# Altium PCB SD171-6.0PCB4.PcbDoc (part 7 of 11)
Units mil, origin at the board's own origin, x right, y up, seen from the top; angles counter-clockwise.
Board outline 5995 x 3921.26 mil, 6 copper layers (Top Layer, GND, Mid-Layer 1, Mid-Layer 2, VCC, Bottom Layer); 477 components, 539 nets, 2143 pads, 1050 vias.
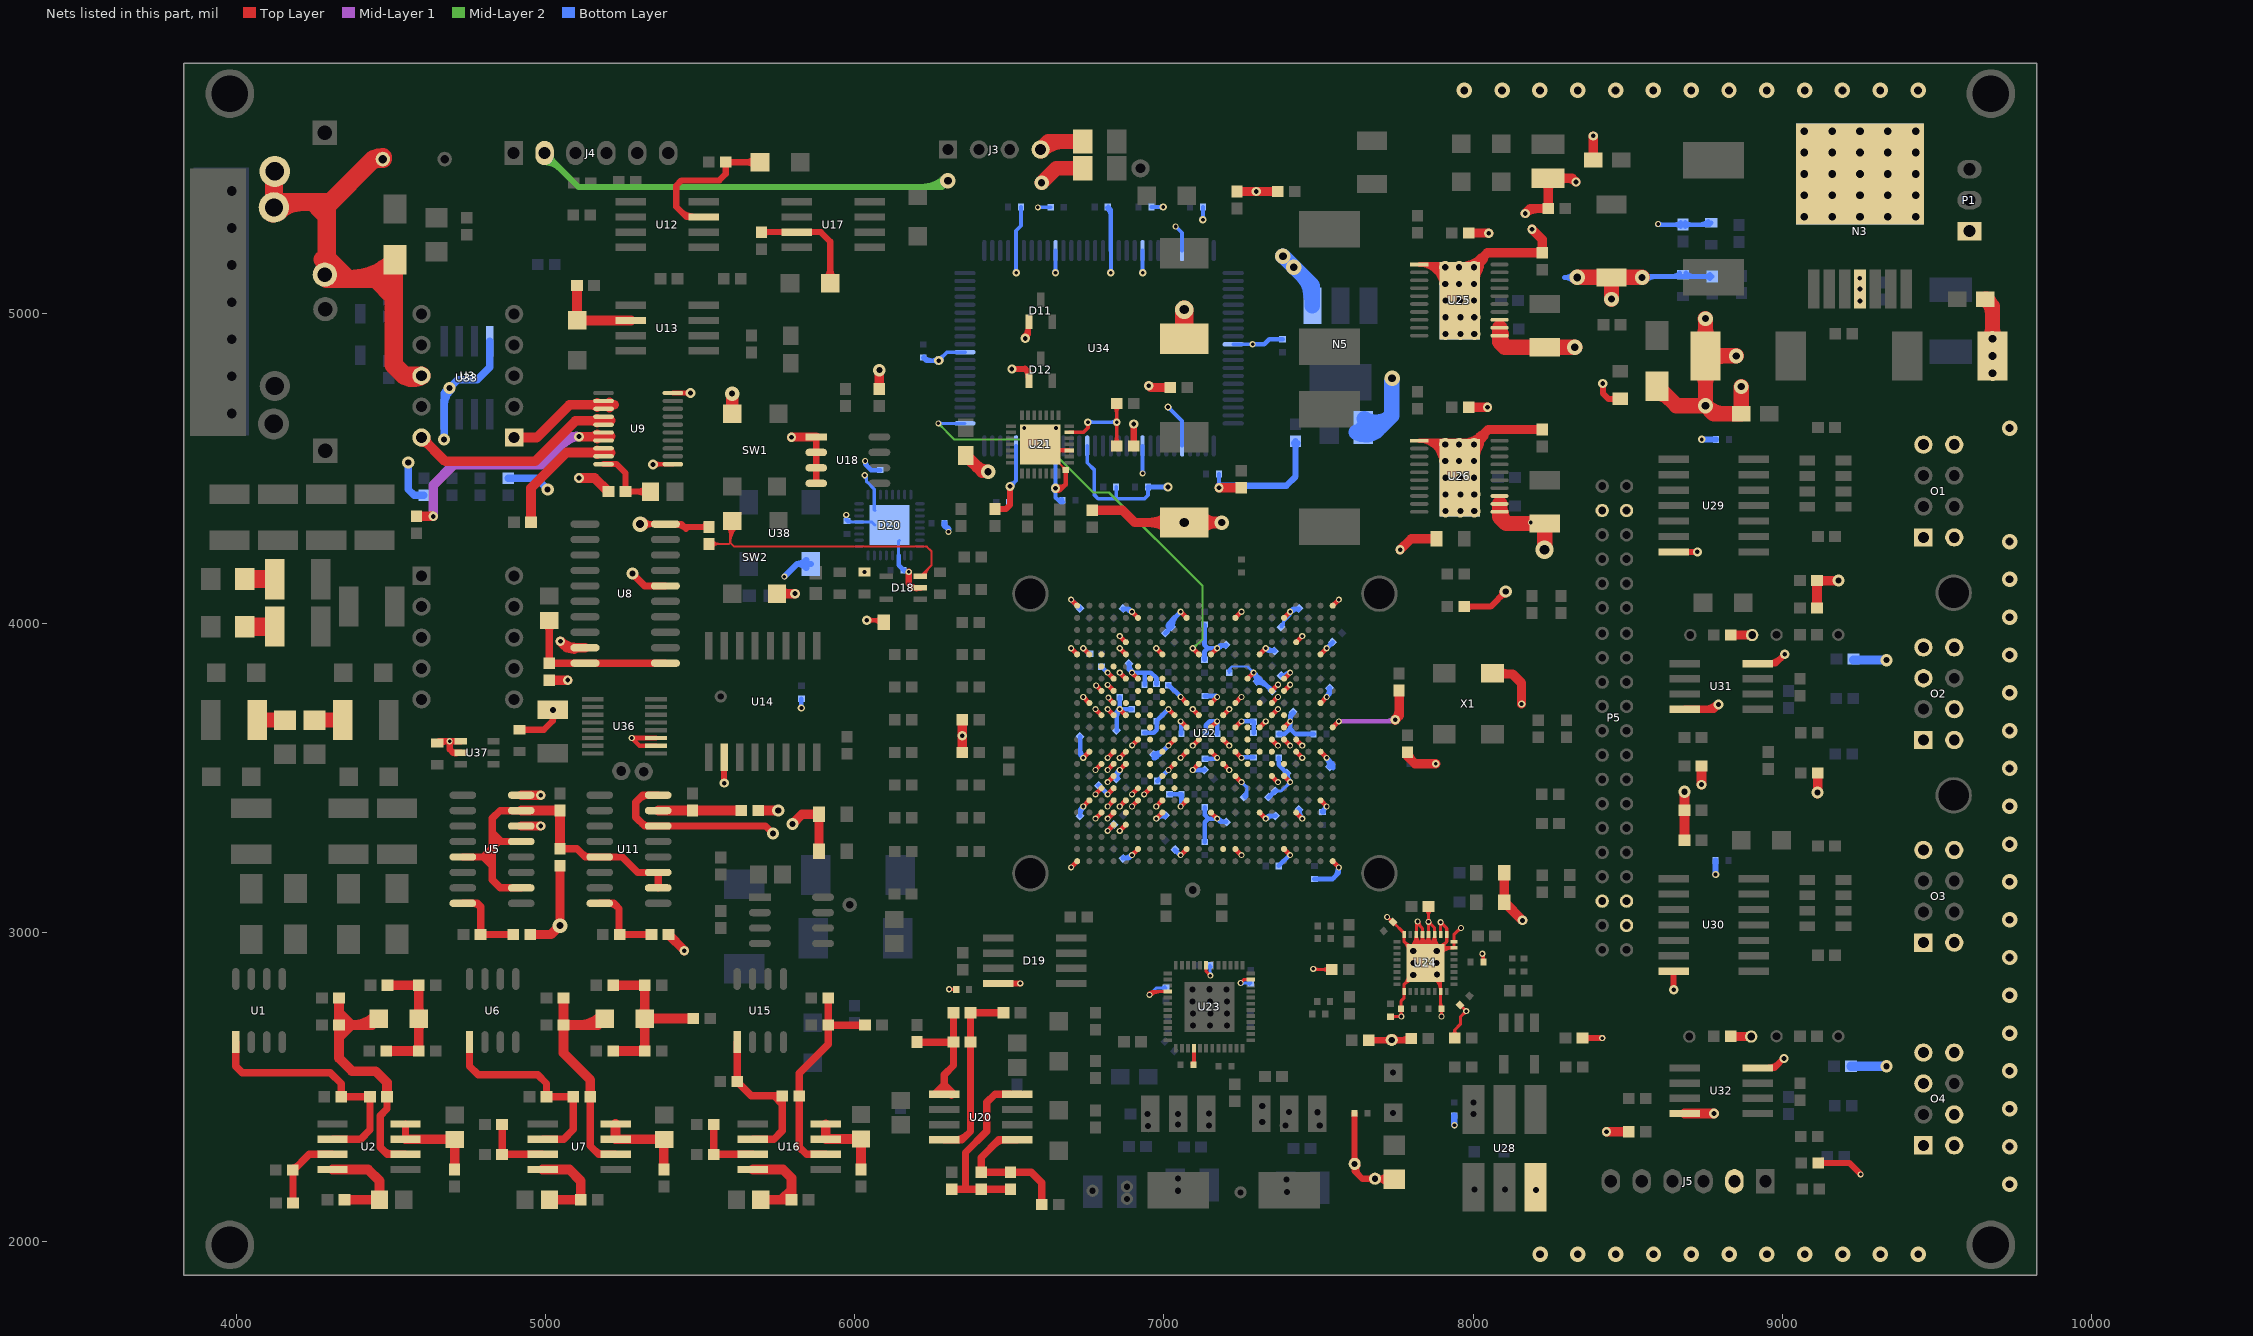
[diagram p11: the nets of this part, all layers, seen from the top]

## Via types
v1: diameter 19.68, hole 11.81, Top Layer to Bottom Layer, 521 vias
v2: diameter 50, hole 25, Top Layer to Bottom Layer, 162 vias
v3: diameter 30, hole 15, Top Layer to Bottom Layer, 100 vias
v4: diameter 39.37, hole 19.68, Top Layer to Bottom Layer, 74 vias
v5: diameter 31.5, hole 15.75, Top Layer to Bottom Layer, 44 vias
v6: diameter 40, hole 20, Top Layer to Bottom Layer, 38 vias
v7: diameter 24, hole 12, Top Layer to Bottom Layer, 33 vias
v8: diameter 47.24, hole 23.62, Top Layer to Bottom Layer, 24 vias
v9: diameter 59.06, hole 31.5, Top Layer to Bottom Layer, 10 vias
v10: diameter 60, hole 30, Top Layer to Bottom Layer, 9 vias
v11: diameter 25.98, hole 12.99, Top Layer to Bottom Layer, tented top, 9 vias
v12: diameter 23.62, hole 11.81, Top Layer to Bottom Layer, 8 vias
v13: diameter 20, hole 12, Top Layer to Bottom Layer, 6 vias
v14: diameter 50, hole 27.56, Top Layer to Bottom Layer, 4 vias
v15: diameter 51.18, hole 27.56, Top Layer to Bottom Layer, 2 vias
v16: diameter 39.37, hole 23.62, Top Layer to Bottom Layer, 2 vias
v17: diameter 80, hole 40, Top Layer to Bottom Layer, 1 vias
v18: diameter 47.24, hole 19.68, Top Layer to Bottom Layer, 1 vias
v19: diameter 47.24, hole 27.56, Top Layer to Bottom Layer, 1 vias
v20: diameter 22.05, hole 11.81, Top Layer to Bottom Layer, 1 vias

## Nets (pads, with @x,y where several pads share a name; then routed paths per layer and width w, separated by ;. In a path a pad name is that pad's centre, name@x,y a point inside that pad or via, vN(x,y) a via of type N, cw(c..) or ccw(c..) an arc to the next point about the centre after c; other vN are vias at no path point) (continued)
GND: (continued)
  Bottom Layer w7: C164.1@7207.58,3844.82 ccw(c7203.71,3851.02) 7211.02,3851.02 ; C164.1@7211.02,3839.3 7211.02,3851.02 ; C164.1@7214.46,3844.82 cw(c7218.32,3851.02) 7211.02,3851.02 ; v1(7290.1,3839.47) 7270.56,3859 7219,3859 ; 7211.02,3851.02 7219,3859 ; 7219,3859 ccw(c7228,3850) 7217.42,3842.92 cw(c7228,3850) 7219,3859 ; 7279.27,3850.29 cw(c7268.44,3839.47) v1@7283.75,3839.47 ; 7279.27,3850.29 ccw(c7290.1,3861.12) v1@7290.1,3845.81 ; 7279.27,3850.29 cw(c7268.44,3839.47) v1@7283.75,3839.47 ; 7279.27,3850.29 ccw(c7290.1,3861.12) v1@7290.1,3845.81 ; 7279.27,3850.29 ccw(c7290.1,3861.12) v1@7290.1,3845.81 ; 7279.27,3850.29 cw(c7268.44,3839.47) v1@7283.75,3839.47 ; C164.1@7211.6,3839.02 cw(c7220.78,3845.16) 7212.97,3852.97 ccw(c7220.78,3845.16) C164.1@7211.6,3839.02
  Bottom Layer w10: v1@5968.58,4346.58 cw(c5960.31,4338.31) 5972,4338.31 cw(c5983.69,4338.31) v1@5975.42,4346.58 ; v1@5972,4344.23 ccw(c5987.54,4344.23) C227.1@5976.55,4333.23 ; v1(5972,4350) 5972,4331.72 5976.87,4326.84 D20.21@6013.57,4326.84 6054.91,4326.84 D20.33@6064.76,4317 ; C227.1@5978.55,4333.23 ccw(c5993.98,4348.67) 5993.98,4326.84 ; v1@6029.21,4474.04 cw(c6017.32,4457.12) 6038,4457.12 ; v1(6032,4478) 6033,4478 6038,4473 6038,4458 6062.79,4433.21 D20.26@6062.79,4415.43 6062.79,4366.21 D20.33@6064.76,4364.24 ; D20.11@6141.53,4218.57 6141.53,4264.53 D20.33@6144,4267 ; v1(6953,2797) 6975.7,2819.7 C158.2@7006.98,2819.7 ; v1@6953,2801.84 ccw(c6953,2813.53) 6961.27,2805.27 ccw(c6969.53,2797) v1@6957.84,2797 ; C146.1@6978.3,3488.98 C146.1@6978.98,3488.98 ; C158.2@7002.45,2816.16 ccw(c6993.91,2807.63) 6993.91,2819.7 ccw(c6993.91,2831.77) C158.2@7002.45,2823.23 ; C178.1@7145.77,2888.45 cw(c7137.23,2879.91) 7149.3,2879.91 cw(c7161.37,2879.91) C178.1@7152.84,2888.45 ; v1@7146.58,2862.42 ccw(c7140,2869) 7149.3,2869 ; 7149.3,2872.38 ccw(c7163.38,2872.38) v1@7153.42,2862.42 ; C178.1@7149.3,2892.98 7149.3,2862.7 7150,2862 v1(7150,2859) ; v1@7169.01,3763.7 v1(7171.99,3760.73) ; v1@7169.56,3566.3 v1(7171.99,3563.87) ; v1(7248,2835) 7249,2835 7249.3,2834.7 C171.1@7280.98,2834.7 ; v1(7250.73,3485.13) 7269,3466.86 ; v1@7251.42,2831.58 cw(c7258.96,2824.04) 7258.96,2834.7 ; v1@7251.42,2838.42 ccw(c7260.42,2847.42) 7260.42,2834.7 ; C177.1@7259.2,3436.78 7269,3446.57 7269,3466.86 ; C171.1@7276.45,2831.16 ccw(c7267.91,2822.63) 7267.91,2834.7 ccw(c7267.91,2846.77) C171.1@7276.45,2838.23 ; C187.1@7358.8,3456.22 7379.3,3456.22 v1(7408.21,3485.13) ; C187.1@7363.04,3453.4 cw(c7369.87,3446.57) C187.1@7369.87,3456.22 ; C187.1@7363.04,3460.47 ccw(c7373.28,3470.71) 7373.28,3456.22 ; C180.1@7378.12,3992.15 ccw(c7372.99,4005.58) 7387.36,4005.58 ; C180.1@7379.2,3986.78 7387.36,3994.94 7387.36,4005.58 ; 7397.74,4015.33 cw(c7424.46,4008.17) v1@7410.63,4032.12 ; v1(7408.21,4036.32) 7408.21,4026.42 ; 7258.99,3476.87 cw(c7267.26,3485.13) 7255.57,3485.13 ccw(c7267.26,3485.13) 7258.99,3476.87 ; 7258.99,3476.87 ccw(c7250.73,3468.6) 7250.73,3480.29 cw(c7250.73,3468.6) 7258.99,3476.87 ; 7269,3466.86 cw(c7236.34,3466.86) 7256.78,3441.38 ccw(c7236.34,3466.86) 7269,3466.86 ; 7387.36,4005.58 7408.21,4026.42 ; 7392.94,4011.16 ccw(c7367.79,4036.32) v1@7403.36,4036.32 ; 7392.94,4011.16 ccw(c7367.79,4036.32) v1@7403.36,4036.32 ; 7392.94,4011.16 ccw(c7367.79,4036.32) v1@7403.36,4036.32 ; 7399.94,3476.87 cw(c7408.21,3468.6) 7408.21,3480.29 ccw(c7408.21,3468.6) 7399.94,3476.87 ; 7399.94,3476.87 ccw(c7391.67,3485.13) 7403.36,3485.13 cw(c7391.67,3485.13) 7399.94,3476.87 ; 7408.21,4026.42 cw(c7415.89,4026.42) 7411.18,4032.49 ccw(c7415.89,4026.42) 7408.21,4026.42 ; 7408.21,4026.42 ccw(c7400.52,4026.42) 7405.24,4032.49 cw(c7400.52,4026.42) 7408.21,4026.42 ; C177.1@7263.04,3433.58 ccw(c7253.06,3446.01) 7269,3446.01 cw(c7253.06,3446.01) C177.1@7263.04,3433.58
  Bottom Layer w12: v3(6271,4849) 6298.2,4876.2 U34.40@6355.94,4876.2 ; v3@6271.07,4858 ccw(c6271.24,4879.15) 6286.37,4864.37 ; v3@6271.1,4858 ccw(c6271.35,4878.86) 6285.93,4863.94 ccw(c6300.86,4849.35) v3@6280,4849.1 ; v3@6280,4849.07 cw(c6301.15,4849.24) 6286.37,4864.37 ; C115.1@6499.3,4390.98 6499.3,4439.3 v3(6502,4442) 6503,4442 6521.3,4460.3 U34.26@6521.3,4573.06 ; v7(6522,5133) 6521.3,5133.7 U34.55@6521.3,5204.94 6521.3,5269.3 6537.3,5285.3 C114.1@6537.3,5345.98 ; v1(6592,5345) C117.1@6633.7,5345.02 ; v7(6649,5133) 6649.25,5133.25 U34.60@6649.25,5204.94 ; U34.21@6649.25,4573.06 6649.25,4436.25 v3(6649,4436) 6649,4405 ; 6660.78,4393.22 ccw(c6669.66,4402.1) C118.1@6675.27,4390.86 ; C118.1@6669.91,4401.6 cw(c6661.82,4417.82) 6649,4405 ; C118.1@6671.7,4397.02 6656.98,4397.02 6649,4405 ; U34.17@6751.61,4573.06 6751.61,4518.28 6774.84,4495.05 6774.84,4414.16 6787,4402 6846,4402 ; v7(6828,5133) 6828.39,5133.39 U34.67@6828.39,5204.94 ; C120.1@6845.3,4439.98 6845.3,4402.7 6846,4402 ; U34.10@6930.75,4573.06 6930.75,4484.25 v1(6931,4484) ; U34.71@6930.75,5204.94 6930.75,5133.25 v7(6931,5133) ; C127.1@6948.3,4439.98 6948.3,4413.3 6937,4402 6846,4402 ; C138.1@6959.3,5345.98 v7(6998,5346) ; v7(7013,4699) 7058.7,4653.3 U34.5@7058.7,4573.06 ; v1(7038,5283) 7058.7,5262.3 U34.76@7058.7,5204.94 ; v7(7126,5305) 7126.3,5305.3 C152.1@7126.3,5345.98 ; v3(7178,4438) 7178,4444 7178.3,4444.3 C159.1@7178.3,4481.98 ; U34.90@7224.06,4901.8 7286.8,4901.8 v1(7287,4902) ; v3@6271,4858 ccw(c6271,4879.73) 6286.36,4864.36 ; v3@6271,4858 ccw(c6271,4879.73) 6286.36,4864.36 ; v3@6271,4858 ccw(c6271,4879.73) 6286.36,4864.36 ; v3@6280,4849 cw(c6301.73,4849) 6286.36,4864.36 ; v3@6280,4849 cw(c6301.73,4849) 6286.36,4864.36 ; v3@6280,4849 cw(c6301.73,4849) 6286.36,4864.36 ; v3@6495.64,4435.64 cw(c6486.79,4426.79) 6499.3,4426.79 ; v3@6495.64,4435.64 cw(c6486.79,4426.79) 6499.3,4426.79 ; v3@6495.64,4435.64 cw(c6486.79,4426.79) 6499.3,4426.79 ; 6499.3,4413.76 cw(c6530.24,4413.76) v3@6508.36,4435.64 ; 6499.3,4413.76 cw(c6530.24,4413.76) v3@6508.36,4435.64 ; 6499.3,4413.76 cw(c6530.24,4413.76) v3@6508.36,4435.64 ; v3@6502,4451 ccw(c6502,4475.14) 6519.07,4458.07 ; v3@6502,4451 ccw(c6502,4475.14) 6519.07,4458.07 ; v3@6502,4451 ccw(c6502,4475.14) 6519.07,4458.07 ; v3@6511,4442 cw(c6530.31,4442) 6516.66,4455.66 ; v3@6511,4442 cw(c6530.31,4442) 6516.66,4455.66 ; v3@6511,4442 cw(c6530.31,4442) 6516.66,4455.66 ; v3@6642.64,4429.64 cw(c6627.27,4414.27) 6649,4414.27 ; v3@6642.64,4429.64 cw(c6627.27,4414.27) 6649,4414.27 ; v3@6642.64,4429.64 cw(c6627.27,4414.27) 6649,4414.27 ; v3@6642.64,4442.36 ccw(c6626.66,4458.34) 6649.25,4458.34 ; v3@6642.64,4442.36 ccw(c6626.66,4458.34) 6649.25,4458.34 ; v3@6642.64,4442.36 ccw(c6626.66,4458.34) 6649.25,4458.34 ; 6649,4414.27 cw(c6670.73,4414.27) v3@6655.36,4429.64 ; 6649,4414.27 cw(c6670.73,4414.27) v3@6655.36,4429.64 ; 6649,4414.27 cw(c6670.73,4414.27) v3@6655.36,4429.64 ; 6649.25,4457.12 ccw(c6670.12,4457.12) v3@6655.36,4442.36 ; 6649.25,4457.12 ccw(c6670.12,4457.12) v3@6655.36,4442.36 ; 6649.25,4457.12 ccw(c6670.12,4457.12) v3@6655.36,4442.36 ; 6930.75,4493.89 ccw(c6940.89,4493.89) v1@6933.72,4486.72 ; 6930.75,4493.89 ccw(c6940.89,4493.89) v1@6933.72,4486.72 ; 6930.75,4493.89 ccw(c6940.89,4493.89) v1@6933.72,4486.72 ; v7@7013,4693 cw(c7013,4678.51) 7023.24,4688.76 ; v7@7013,4693 cw(c7013,4678.51) 7023.24,4688.76 ; v7@7013,4693 cw(c7013,4678.51) 7023.24,4688.76 ; v7@7019,4699 ccw(c7033.49,4699) 7023.24,4688.76 ; v7@7019,4699 ccw(c7033.49,4699) 7023.24,4688.76 ; v7@7019,4699 ccw(c7033.49,4699) 7023.24,4688.76 ; v3@7171.64,4444.36 ccw(c7155.55,4460.45) 7178.3,4460.45 ; v3@7171.64,4444.36 ccw(c7155.55,4460.45) 7178.3,4460.45 ; v3@7171.64,4444.36 ccw(c7155.55,4460.45) 7178.3,4460.45 ; 7178.3,4459 ccw(c7199,4459) v3@7184.36,4444.36 ; 7178.3,4459 ccw(c7199,4459) v3@7184.36,4444.36 ; 7178.3,4459 ccw(c7199,4459) v3@7184.36,4444.36 ; v7@6517.76,5137.24 ccw(c6509.21,5145.79) 6521.3,5145.79 cw(c6509.21,5145.79) v7@6517.76,5137.24 ; 6521.3,5149.18 ccw(c6538.18,5149.18) 6526.24,5137.24 cw(c6538.18,5149.18) 6521.3,5149.18 ; v7@6644.76,5137.24 ccw(c6633.91,5148.09) 6649.25,5148.09 cw(c6633.91,5148.09) v7@6644.76,5137.24 ; 6649.25,5146.88 ccw(c6662.88,5146.88) 6653.24,5137.24 cw(c6662.88,5146.88) 6649.25,5146.88 ; v7@6823.76,5137.24 ccw(c6812.58,5148.42) 6828.39,5148.42 cw(c6812.58,5148.42) v7@6823.76,5137.24 ; 6828.39,5146.55 ccw(c6841.55,5146.55) 6832.24,5137.24 cw(c6841.55,5146.55) 6828.39,5146.55 ; v7@6926.76,5137.24 ccw(c6917.12,5146.88) 6930.75,5146.88 cw(c6917.12,5146.88) v7@6926.76,5137.24 ; 6930.75,5148.09 ccw(c6946.09,5148.09) 6935.24,5137.24 cw(c6946.09,5148.09) 6930.75,5148.09 ; 6983.47,5345.98 ccw(c6983.47,5360.53) 6993.76,5350.24 cw(c6983.47,5360.53) 6983.47,5345.98 ; 6983.56,5345.98 cw(c6983.56,5331.56) 6993.76,5341.76 ccw(c6983.56,5331.56) 6983.56,5345.98 ; v7@7121.76,5309.24 ccw(c7110.79,5320.21) 7126.3,5320.21 cw(c7110.79,5320.21) v7@7121.76,5309.24 ; 7126.3,5318.76 ccw(c7139.76,5318.76) 7130.24,5309.24 cw(c7139.76,5318.76) 7126.3,5318.76
  Bottom Layer w15: v7(5827,3725) C110.1@5826.98,3754.7 ; v1(6033,4524) 6033,4514 6052.3,4494.7 C224.1@6082.02,4494.7 ; v1@6035.34,4524 ccw(c6065.14,4524) 6044.07,4502.93 ; D20.11@6141.53,4218.57 6141.53,4187.15 C226.1@6157.7,4170.98 6160.68,4168 6176,4168 6176,4167.26 v1(6174.4,4165.66) ; C226.1@6159.47,4171.75 ccw(c6168.52,4180.81) v1@6168.52,4168 ; C113.1@6220.98,4858.7 6230.68,4849 v3(6271,4849) ; v1(6699.54,4075.69) 6728.8,4046.43 C121.1@6728.8,4046.22 ; C126.1@6728.8,3376.22 6728.8,3396.28 v1(6738.91,3406.39) ; 6728.8,3392.09 cw(c6740.89,3392.09) v1@6739.23,3404.07 ; C124.1@6728.78,3632.8 6728.78,3574.01 v1(6738.91,3563.87) ; v1(6738.91,3918.21) 6756.82,3900.3 C123.1@6761.02,3900.3 ; C125.1@6788.2,3474.78 6788.64,3474.78 v1(6817.65,3445.76) ; C122.1@6797.98,3858.7 6817.22,3839.47 v1(6817.65,3839.47) ; v1(6817.65,3327.65) C135.1@6837.78,3347.8 ; C119.1@6818.23,5342.48 cw(c6817.96,5332.06) 6828.39,5332.06 ; C119.1@6819.3,5345.98 6828.39,5336.9 U34.67@6828.39,5204.94 ; C134.1@6846.8,3495.22 6846.8,3514.28 v1(6857.02,3524.5) ; 6846.8,3510.05 cw(c6859.06,3510.05) v1@6857.35,3522.18 ; C133.1@6846.8,3652.22 6846.8,3711.13 v1(6857.02,3721.36) ; 6846.8,3706.9 cw(c6859.06,3706.9) v1@6857.35,3719.04 ; C130.1@6856.7,3760.02 6856.7,3721.68 v1(6857.02,3721.36) ; C128.1@6867.22,4046.2 6886.51,4046.2 v1(6896.39,4036.32) ccw(c6876.94,4016.86) C128.1@6868.68,4043.11 ; 6885.66,4040.01 ccw(c6892.45,4051.54) v1@6895.81,4038.58 ; C129.1@6886.78,3868.8 6886.78,3849.08 v1(6896.39,3839.47) 6936,3839.47 ; 6892.79,3850.23 cw(c6881.2,3843.54) v1@6894.13,3840.07 ; C132.1@6895.36,3721.36 v1(6857.02,3721.36) ; C144.1@6936.02,3645.3 6966.3,3645.3 6976.3,3655.3 C143.1@6976.3,3681.98 6976.3,3683.15 v1(7014.5,3721.36) ; C131.1@6937.3,3799.98 6937.3,3838.17 6936,3839.47 ; C127.1@6948.3,4439.98 v3(7013,4440) ; C145.1@6965.8,3574.22 6985.48,3574.22 v1(7014.5,3603.24) ; C145.1@6966.51,3562.43 ccw(c6966.51,3579.78) 6978.77,3567.51 ; C142.1@6976.02,3802.3 6976.02,3820.98 6957.53,3839.47 6936,3839.47 ; C146.1@6978.98,3488.98 v1(7014.5,3524.5) ; C147.1@7003.37,3374.12 ccw(c6995.19,3346.97) v1(6975.13,3367.02) 6985.33,3377.22 C147.1@7004.8,3377.22 ; C139.1@7004.8,3967.22 7024.2,3986.63 C140.1@7024.2,3986.78 7024.2,4006.64 v1(7053.87,4036.32) ; C140.1@7012.41,3987.48 cw(c7030.19,3987.48) 7017.62,4000.06 ; C141.1@7013.98,3798.7 7015.9,3798.7 v1(7053.87,3760.73) ; C156.1@7017.98,3445.7 7056.38,3445.7 C155.1@7056.7,3446.02 7056.7,3409.22 v1(7053.87,3406.39) ; C148.1@7035.2,3266.78 7053.06,3248.91 v1(7053.87,3248.91) ; v1(7053.87,3681.99) 7056.3,3679.56 C154.1@7056.3,3641.98 ; v1(7093.24,3524.5) 7131.52,3524.5 C167.1@7131.8,3524.22 ; C162.1@7131.02,3881.3 7131.02,3907.02 7142.21,3918.21 ; C160.1@7131.02,3994.7 7131.02,3929.39 7142.21,3918.21 ; C170.1@7132.02,3291.3 7132.02,3355.06 7143.98,3367.02 ; C169.1@7131.98,3403.7 7131.98,3379.02 7143.98,3367.02 ; C166.1@7132.98,3560.7 7168.81,3560.7 v1(7171.99,3563.87) ; C163.2@7133.02,3763.7 v1@7169.01,3763.7 ; C153.1@7135.3,3641.98 7135.3,3669.3 7147.99,3681.99 v1(7171.99,3681.99) 7172.7,3681.27 C165.1@7172.7,3641.98 ; v1@7172.54,3920.48 ccw(c7175.67,3933.49) 7182.65,3922.08 ; C161.1@7199.38,3925.12 ccw(c7191.48,3898.72) v1(7171.99,3918.21) ; C168.1@7201.78,3356.8 7182.21,3356.8 v1(7171.99,3367.02) 7143.98,3367.02 ; v1(7250.73,3563.87) 7252.15,3565.3 C174.1@7289.98,3565.3 ; v1(7250.73,3681.99) 7288.7,3681.99 C173.1@7289.98,3680.7 C175.1@7289.98,3644.3 ; v1(7287,4902) 7325,4902 7341.3,4918.3 C179.1@7384.02,4918.3 ; v1@7292.36,3838.86 ccw(c7305.28,3835.4) 7293.7,3828.71 ; C172.1@7297.12,3811.63 ccw(c7270.29,3819.66) v1(7290.1,3839.47) 7300.22,3829.34 C172.1@7300.22,3810.2 7320.22,3810.2 C183.1@7350.22,3780.2 ; 7307.33,3822.24 cw(c7296,3810.91) C172.1@7312.02,3810.91 ; v1(7329.47,3367.02) 7338.67,3376.22 C189.1@7360.8,3376.22 ; v1@7330.07,3915.94 cw(c7333.54,3903.02) 7340.23,3914.61 ; C176.1@7338.2,3436.78 7339.35,3436.78 C187.1@7358.8,3456.22 ; C182.1@7356.12,3912.82 cw(c7346.85,3935.59) v1(7329.47,3918.21) 7337.87,3909.8 C182.1@7357.78,3909.8 ; C190.1@7371.3,3214.02 7406.2,3248.91 v1(7408.21,3248.91) ; C186.1@7371.3,3563.98 7371.3,3541.27 C188.1@7397.78,3514.8 ; C185.1@7371.3,3640.98 7390.98,3640.98 7408.21,3658.21 ; C181.1@7379.2,3830.78 7399.52,3830.78 v1(7408.21,3839.47) ; 7397.45,3835.87 cw(c7404.14,3824.28) v1@7407.6,3837.2 ; C188.1@7400.89,3513.4 ccw(c7428.56,3505.49) v1(7408.21,3485.13) 7397.78,3495.56 C188.1@7397.78,3514.8 ; v1@7408.76,4038.59 ccw(c7411.91,4051.6) 7418.88,4040.18 ; C184.1@7418.2,3711.78 7408.21,3701.78 v1(7408.21,3681.99) 7408.21,3658.21 ; C191.1@7435.37,4043.13 ccw(c7427.47,4017.05) v1(7408.21,4036.32) 7418.11,4046.22 C191.1@7436.8,4046.22 ; C195.1@7439.9,3395.45 ccw(c7468.47,3387.91) v1(7447.58,3367.02) 7436.78,3377.82 C195.1@7436.78,3396.8 ; C193.1@7483.7,3640.98 7425.43,3640.98 7408.21,3658.21 ; C197.1@7486.98,3171.7 7545.7,3171.7 7566,3192 v1(7566,3209) ; C196.1@7513.02,3388.3 7513.02,3393.09 v1(7526.32,3406.39) ; v1@7526,3561.55 cw(c7524.43,3549.86) 7536.22,3549.86 ; v1(7526.32,3918.21) 7545.78,3937.67 C204.1@7545.78,3937.8 ; C192.1@7533.11,3788.32 cw(c7506.91,3780.14) v1(7526.32,3760.73) 7536.2,3770.61 C192.1@7536.2,3789.78 ; C194.1@7533.14,3535.67 ccw(c7506.63,3544.19) v1(7526.32,3563.87) 7536.22,3553.97 C194.1@7536.22,3534.2 ; 7542.88,3547.31 cw(c7530.48,3534.91) C194.1@7548.02,3534.91 ; 7543.69,3546.5 cw(c7532.93,3535.74) C194.1@7547.42,3531.09 ; 7549.98,3175.98 ccw(c7516.96,3209) v1@7563.66,3209 ; 7554.2,3180.2 ccw(c7530.49,3203.91) v1@7563.68,3208.67 ; C207.1@7837.3,3544.98 v7(7879,3545) ; v1@8186,4325 8185,4324 8186,4324 v1(8187,4325) ; v2@8324.57,5105.68 ccw(c8295,5076.36) 8295,5118 ; v2@8324.57,5130.32 cw(c8295,5159.64) 8295,5118 ; v2(8337,5118) 8295,5118 ; v8(8547,5118) 8550,5121 R141.1@8774,5121 ; v8@8558.4,5106.6 cw(c8593.16,5071.84) 8593.16,5121 ; v8@8558.4,5129.4 ccw(c8578.68,5149.68) 8578.68,5121 ; v1(8599,5291) 8598,5291 8596,5289 R142.1@8679,5289 8765,5289 C219.1@8771,5295 ; v1@8600.66,5292.66 ccw(c8609.48,5301.48) 8609.48,5289 ; 8641.72,5121 ccw(c8641.72,5159.59) C218.1@8669.01,5132.3 ; R142.1@8671.58,5281.58 ccw(c8653.65,5263.65) 8653.65,5289 ccw(c8653.65,5314.35) R142.1@8671.58,5296.42 ; R142.1@8686.42,5281.58 cw(c8704.35,5263.65) 8704.35,5289 cw(c8704.35,5314.35) R142.1@8686.42,5296.42 ; C218.1@8688.99,5132.3 ccw(c8716.28,5159.59) 8716.28,5121 ; 8733.72,5289 ccw(c8733.72,5327.59) C219.1@8761.01,5300.3 ; R141.1@8766.58,5113.58 ccw(c8748.65,5095.65) 8748.65,5121 ccw(c8748.65,5146.35) R141.1@8766.58,5128.42 ; 6252.89,4849 cw(c6252.89,4830.89) v3@6265.7,4843.7 ; 6252.89,4849 ccw(c6252.89,4867.11) v3@6265.7,4854.3 ; 6252.89,4849 cw(c6252.89,4830.89) v3@6265.7,4843.7 ; 6252.89,4849 ccw(c6252.89,4867.11) v3@6265.7,4854.3 ; 6252.89,4849 ccw(c6252.89,4867.11) v3@6265.7,4854.3 ; 6252.89,4849 cw(c6252.89,4830.89) v3@6265.7,4843.7 ; v1(6857.02,3524.5) ccw(c6876.95,3504.57) 6849.91,3496.64 cw(c6876.95,3504.57) v1(6857.02,3524.5) ; C136.1@6867.2,3238.78 ccw(c6867.2,3276.81) 6894.7,3250.53 cw(c6867.2,3276.81) C136.1@6867.2,3238.78 ; C136.1@6867.2,3238.78 6886.26,3238.78 v1(6896.39,3248.91) ; C128.1@6867.22,4046.2 cw(c6867.23,4007.65) v1@6894.72,4034.67 ; C128.1@6867.22,4046.2 cw(c6867.23,4007.65) v1@6894.72,4034.67 ; C128.1@6867.22,4046.2 cw(c6867.23,4007.65) v1@6894.72,4034.67 ; C129.1@6886.78,3868.34 ccw(c6925.26,3868.34) v1@6898.05,3841.12 ; C129.1@6886.78,3868.34 ccw(c6925.26,3868.34) v1@6898.05,3841.12 ; C129.1@6886.78,3868.34 ccw(c6925.26,3868.34) v1@6898.05,3841.12 ; v1(6896.39,3248.91) cw(c6876.6,3268.7) 6868.62,3241.88 ccw(c6876.6,3268.7) v1(6896.39,3248.91) ; 6994.85,4439.98 ccw(c6994.85,4458.15) v3@7007.7,4445.3 ; 6994.85,4439.98 ccw(c6994.85,4458.15) v3@7007.7,4445.3 ; 6994.85,4439.98 ccw(c6994.85,4458.15) v3@7007.7,4445.3 ; 6994.93,4439.98 cw(c6994.93,4421.93) v3@7007.7,4434.7 ; 6994.93,4439.98 cw(c6994.93,4421.93) v3@7007.7,4434.7 ; 6994.93,4439.98 cw(c6994.93,4421.93) v3@7007.7,4434.7 ; C147.1@7004.8,3377.22 ccw(c7004.8,3338.22) 6976.81,3365.39 cw(c7004.8,3338.22) C147.1@7004.8,3377.22 ; 7142.21,3918.21 v1(7171.99,3918.21) ; v1(7171.99,3918.21) 7182,3928.22 C161.1@7200.8,3928.22 ; v1@7173.68,3916.59 cw(c7200.8,3890.81) C161.1@7200.8,3928.22 ; v1@7173.68,3916.59 cw(c7200.8,3890.81) C161.1@7200.8,3928.22 ; v1@7173.68,3916.59 cw(c7200.8,3890.81) C161.1@7200.8,3928.22 ; v1@7288.44,3837.81 cw(c7259.99,3809.36) C172.1@7300.22,3809.36 ; v1@7288.44,3837.81 cw(c7259.99,3809.36) C172.1@7300.22,3809.36 ; v1@7288.44,3837.81 cw(c7259.99,3809.36) C172.1@7300.22,3809.36 ; v1@7331.12,3919.86 ccw(c7355.42,3944.16) C182.1@7355.42,3909.8 ; v1@7331.12,3919.86 ccw(c7355.42,3944.16) C182.1@7355.42,3909.8 ; v1@7331.12,3919.86 ccw(c7355.42,3944.16) C182.1@7355.42,3909.8 ; C181.1@7381.57,3830.78 ccw(c7381.57,3866.1) v1@7406.55,3841.12 ; C181.1@7381.57,3830.78 ccw(c7381.57,3866.1) v1@7406.55,3841.12 ; C181.1@7381.57,3830.78 ccw(c7381.57,3866.1) v1@7406.55,3841.12 ; C188.1@7397.78,3514.8 ccw(c7436.27,3514.8) 7409.82,3486.83 cw(c7436.27,3514.8) C188.1@7397.78,3514.8 ; v1@7409.9,4034.7 cw(c7436.8,4009.08) C191.1@7436.8,4046.22 ; v1@7409.9,4034.7 cw(c7436.8,4009.08) C191.1@7436.8,4046.22 ; v1@7409.9,4034.7 cw(c7436.8,4009.08) C191.1@7436.8,4046.22 ; C195.1@7436.78,3396.8 ccw(c7474.73,3396.8) 7449.15,3368.75 cw(c7474.73,3396.8) C195.1@7436.78,3396.8 ; C113.1@6223.75,4860.47 ccw(c6251.43,4888.15) 6251.43,4849 cw(c6251.43,4888.15) C113.1@6223.75,4860.47 ; C126.1@6728.8,3376.32 cw(c6768.98,3376.32) 6740.57,3404.74 ccw(c6768.98,3376.32) C126.1@6728.8,3376.32 ; 6728.78,3594 ccw(c6769.04,3594) 6740.57,3565.53 cw(c6769.04,3594) 6728.78,3594 ; C123.1@6750.29,3906.83 ccw(c6760.02,3916.56) 6760.02,3902.8 cw(c6760.02,3916.56) C123.1@6750.29,3906.83 ; C119.1@6816.53,5343.22 cw(c6787.92,5314.6) 6828.39,5314.6 ccw(c6787.92,5314.6) C119.1@6816.53,5343.22 ; C134.1@6846.8,3494.17 cw(c6887.36,3494.17) 6858.68,3522.85 ccw(c6887.36,3494.17) C134.1@6846.8,3494.17 ; 6846.8,3691.02 cw(c6887.36,3691.02) 6858.68,3719.7 ccw(c6887.36,3691.02) 6846.8,3691.02 ; C145.1@6966.51,3577.43 ccw(c6966.51,3630.99) 7004.38,3593.12 cw(c6966.51,3630.99) C145.1@6966.51,3577.43 ; C140.1@7027.41,3987.48 cw(c7081.41,3987.48) 7043.22,4025.67 ccw(c7081.41,3987.48) C140.1@7027.41,3987.48 ; v1@7052.22,3408.05 ccw(c7041.4,3418.87) 7056.7,3418.87 cw(c7041.4,3418.87) v1@7052.22,3408.05 ; v1@7052.22,3680.33 cw(c7042.36,3670.47) 7056.3,3670.47 ccw(c7042.36,3670.47) v1@7052.22,3680.33 ; 7158.67,3560.7 ccw(c7158.67,3577.19) 7170.33,3565.53 cw(c7158.67,3577.19) 7158.67,3560.7 ; 7159.15,3763.7 cw(c7159.15,3747.89) 7170.33,3759.07 ccw(c7159.15,3747.89) 7159.15,3763.7 ; v1@7173.66,3368.66 ccw(c7201.77,3396.05) C168.1@7201.78,3356.8 cw(c7201.77,3396.05) v1@7173.66,3368.66 ; v1@7289.77,3837.15 cw(c7288.11,3825.14) 7300.22,3825.14 ccw(c7288.11,3825.14) v1@7289.77,3837.15 ; C172.1@7300.93,3806.99 cw(c7300.93,3752.67) 7339.34,3791.08 ccw(c7300.93,3752.67) C172.1@7300.93,3806.99 ; C172.1@7300.93,3821.99 cw(c7300.93,3803.89) 7313.74,3816.69 ccw(c7300.93,3803.89) C172.1@7300.93,3821.99 ; v1@7331.12,3365.37 cw(c7357.34,3339.15) 7357.34,3376.22 ccw(c7357.34,3339.15) v1@7331.12,3365.37 ; v1@7408.21,3682.61 cw(c7445.95,3682.61) 7419.26,3709.3 ccw(c7445.95,3682.61) v1@7408.21,3682.61 ; C196.1@7516.52,3388.3 cw(c7536.54,3388.3) 7522.38,3402.46 ccw(c7536.54,3388.3) C196.1@7516.52,3388.3 ; v1@7524.66,3562.22 cw(c7496.74,3534.3) 7536.22,3534.3 ccw(c7496.74,3534.3) v1@7524.66,3562.22 ; v1@7524.68,3762.4 ccw(c7497.93,3789.77) C192.1@7536.2,3789.78 cw(c7497.93,3789.77) v1@7524.68,3762.4
  Bottom Layer w19.68: C225.1@6289.7,4322.98 6289.7,4316.62 v1@6303,4303.32
  Bottom Layer w20: v1(5772,4150) 5813,4191 ; U38.2@5842.52,4177.9 ccw(c5813,4151.2) 5813,4191 ; U38.2@5842.52,4204.1 cw(c5813,4230.8) 5813,4191 ; U38.2@5857,4191 5813,4191 ; v3@7178,4444 7396,4444 7426,4474 C228.2@7426,4588 ; v3@7181.54,4434.46 cw(c7204.56,4411.44) 7204.56,4444 ; C228.2@7420.34,4581.34 cw(c7406.69,4567.69) 7426,4567.69 cw(c7445.31,4567.69) C228.2@7431.66,4581.34 ; C209.1@7938.98,2406.7 7938.98,2376.02 v1(7940,2375) ; v7(8740,4594) C210.1@8785.7,4594.02 ; v7(8784.7,3186.3) C211.1@8784.7,3232.02
  Bottom Layer w23.62: v4(4555,4519) 4555,4432 4574,4413 C106.2@4606,4413 ; v4(4671,4594) U33.8@4671,4676 4671,4743 4715,4787 4778,4787 4818.64,4827.64 U33.4@4818.64,4912.22 ; v4@4681.95,4741.92 ccw(c4662.47,4753.16) v4@4684.2,4758.98 ; R119.2@4878.32,4468 4970,4468 v4(5006,4432) ; U33.8@4671,4699.95 cw(c4748.05,4699.95) 4693.57,4754.43 ccw(c4748.05,4699.95) U33.8@4671,4699.95 ; U33.8@4671,4709.45 cw(c4738.55,4709.45) 4690.78,4757.22 ccw(c4738.55,4709.45) U33.8@4671,4709.45 ; 4671,4735.96 cw(c4691.33,4735.96) 4688.54,4756.1 ccw(c4691.33,4735.96) 4671,4735.96 ; 4677.2,4733.68 ccw(c4649.49,4749.68) 4680.39,4757.96 cw(c4649.49,4749.68) 4677.2,4733.68
  Bottom Layer w30: R129.2@9223,2566 v6(9338,2566) ; R126.2@9231,3880 v6(9338,3880)
  Bottom Layer w50: v2(7385,5187) 7480.45,5091.55 N5.1@7480.45,5026.29 ; 7447.45,5124.55 cw(c7378.73,5055.82) N5.1@7475.92,5055.82 ; C229.2@7622.64,4617.41 ccw(c7651.85,4665.82) 7691.84,4625.84 ; C229.2@7645.12,4633 7699,4633 7737,4671 ; C229.2@7648.47,4660.22 ccw(c7685.85,4722.15) 7737,4671 ; v2@7737,4780 7737,4671
  other v1: 6031,4165 6303,4295
  other v2: 8216.89,1957.6 8339.24,1957.6 8461.58,1957.6 8583.93,1957.6 8706.27,1957.6 8828.62,1957.6 8950.97,1957.6 9073.31,1957.6 9195.66,1957.6 9318.01,1957.6 9440.35,1957.6 9736,2183.69 9736,2306.04 9736,2428.39 9736,2550.73 9736,2673.08 9736,2795.43 9736,2917.77 9736,3040.12 9736,3162.46 9736,3284.81 9736,3407.16 9736,3529.5 9736,3651.85 9736,3774.2 9736,3896.54 9736,4018.89 9736,4141.24 9736,4263.58 9736,4630.62 7738,4792 9681,4808 9680.59,4920 7420,5151 9072,5314.48 9162,5314.48 9252,5314.48 9342,5314.48 9432,5314.48 9072,5383.65 9162,5383.65 9252,5383.65 9342,5383.65 9432,5383.65 9072,5452.83 9162,5452.83 9252,5452.83 9342,5452.83 9432,5452.83 9072,5522 9162,5522 9252,5522 9342,5522 9432,5522 9072,5591.17 9162,5591.17 9252,5591.17 9342,5591.17 9432,5591.17 7971.74,5723 8094.09,5723 8216.43,5723 8338.78,5723 8461.12,5723 8583.47,5723 8705.82,5723 8828.16,5723 8950.51,5723 9072.86,5723 9195.2,5723 9317.55,5723 9439.9,5723
  other v3: 9252,5042 9252,5080.78 9251,5116
  other v4: 4688,4760
  other v6: 7911,4362 7959,4362 8004,4362 7911,4416 7959,4416 8004,4416 7911,4470 7957,4470 8003,4470 7910,4524 7955,4524 8003,4524 7910,4578 7955,4578 8003,4578 7911,4935 7959,4935 8004,4935 7911,4989 7959,4989 8004,4989 7911,5043 7957,5043 8003,5043 7910,5097 7955,5097 8003,5097 7910,5151 7955,5151 8003,5151
  other v7: 6548,4631 6651,4631
JDQ1A: R26.2 U9.18 U9.19 | length 451.1
  Top Layer w31.5: R26.2@4952,4326 4952,4437 5067,4552 5208,4552 5209,4551 ; 5150.16,4552 ccw(c5150.16,4575.08) U9.18@5166.48,4558.76 ; 5151.27,4552 cw(c5151.27,4530.48) U9.19@5166.48,4545.7
JDQ1B: R20.1 U9.16 U9.17 | length 928.5
  Top Layer w31.5: R20.1@4581,4345 v5(4636,4345) ; v5(5107,4603) 5208,4603 5209,4604 ; 5149.73,4603 ccw(c5149.73,4626.7) U9.16@5166.48,4609.94 ; 5151.7,4603 cw(c5151.7,4582.1) U9.17@5166.48,4596.88
  Mid-Layer 1 w31.5: v5(4636,4345) 4636,4446 4702,4512 4988,4512 5079,4603 v5(5107,4603) ; 5059.2,4583.2 cw(c5107,4535.4) v5(5107,4603) ; 5065,4589 cw(c5100,4554) v5(5107,4603)
JDQ2A: U3.10 U9.14 U9.15 | length 837.5
  Top Layer w31.5: U3.10@4597.64,4600 4674.64,4523 4965,4523 5096,4654 5208,4654 5209,4655 ; 5149.29,4654 ccw(c5149.29,4678.32) U9.14@5166.48,4661.12 ; 5152.14,4654 cw(c5152.14,4633.72) U9.15@5166.48,4648.06 ; 4621.16,4576.48 ccw(c4597.64,4552.95) 4597.64,4586.22 cw(c4597.64,4552.95) 4621.16,4576.48 ; 4621.16,4576.48 cw(c4644.68,4600) 4611.42,4600 ccw(c4644.68,4600) 4621.16,4576.48
JDQ2B: U3.1 U9.12 U9.13 | length 528
  Top Layer w31.5: U3.1@4897.64,4600 4971,4600 5077,4706 5118,4706 5206,4706 5207,4707 ; 5150.16,4706 cw(c5150.16,4682.92) U9.13@5166.48,4699.24 ; 5151.27,4706 ccw(c5151.27,4727.52) U9.12@5166.48,4712.3 ; U9.13@5205.78,4697.55 cw(c5220.74,4688.54) 5220.74,4706 cw(c5220.74,4724.04) U9.12@5206.26,4713.29 ; 4930.9,4600 ccw(c4930.9,4566.73) 4907.38,4590.26 cw(c4930.9,4566.73) 4930.9,4600 ; 4930.9,4600 cw(c4930.9,4633.27) 4907.38,4609.74 ccw(c4930.9,4633.27) 4930.9,4600
LBO#: U22.M5 U34.31 | length 1614.4
  Top Layer w15: v1(7093.24,3918.21) U22.M5@7112.93,3898.52
  Mid-Layer 2 w7: v1(6270,4646) 6322,4594 6599.23,4594 6651,4542.23 ; 6651.03,4542.23 6771.26,4422 6822.46,4422 7125,4119.46 7125,3948 7095.21,3918.21 v1(7093.24,3918.21) ; v1@7092.62,3918.4 cw(c7104.45,3914.72) 7101.25,3926.69 ; v1@6270,4639.66 cw(c6270,4624.35) 6280.83,4635.17 ; v1@6270,4639.66 cw(c6270,4624.35) 6280.83,4635.17 ; v1@6270,4639.66 cw(c6270,4624.35) 6280.83,4635.17 ; v1@6276.34,4646 ccw(c6291.65,4646) 6280.83,4635.17 ; v1@6276.34,4646 ccw(c6291.65,4646) 6280.83,4635.17 ; v1@6276.34,4646 ccw(c6291.65,4646) 6280.83,4635.17 ; v1@7093.24,3924.55 ccw(c7093.24,3944.6) 7107.42,3930.42 ; v1@7093.24,3924.55 ccw(c7093.24,3944.6) 7107.42,3930.42 ; v1@7093.24,3924.55 ccw(c7093.24,3944.6) 7107.42,3930.42 ; v1@7099.59,3918.21 cw(c7110.16,3918.21) 7102.68,3925.68 ; v1@7099.59,3918.21 cw(c7110.16,3918.21) 7102.68,3925.68 ; v1@7099.59,3918.21 cw(c7110.16,3918.21) 7102.68,3925.68
  Bottom Layer w10: v1(6270,4646) 6270.11,4645.89 U34.31@6355.94,4645.89 ; v1@6273.42,4642.58 cw(c6281.42,4634.58) 6281.42,4645.89 ; v1@6273.42,4642.58 cw(c6281.42,4634.58) 6281.42,4645.89 ; v1@6273.42,4642.58 cw(c6281.42,4634.58) 6281.42,4645.89 ; v1@6273.42,4649.42 ccw(c6281.96,4657.96) 6281.96,4645.89 ; v1@6273.42,4649.42 ccw(c6281.96,4657.96) 6281.96,4645.89 ; v1@6273.42,4649.42 ccw(c6281.96,4657.96) 6281.96,4645.89
LX75NC1: U22.W18 | length 27.8
  Top Layer w15: v1(6817.65,3367.02) U22.W18@6837.34,3386.71
LX75NC2: U22.Y18 | length 27.8
  Top Layer w15: v1(6778.28,3367.02) U22.Y18@6797.97,3386.71
LX75NC3: U22.Y16 | length 27.8
  Top Layer w15: v1(6778.28,3445.76) U22.Y16@6797.97,3465.45
LX75NC4: U22.W15 | length 27.8
  Top Layer w15: v1(6817.65,3485.13) U22.W15@6837.34,3504.82
LX75NC5: U22.V13 | length 27.8
  Top Layer w15: v1(6857.02,3563.87) U22.V13@6876.71,3583.56
LX75NC6: U22.W13 | length 27.8
  Top Layer w15: v1(6817.65,3563.87) U22.W13@6837.34,3583.56
LX75NC7: U22.W14 | length 27.8
  Top Layer w15: v1(6817.65,3524.5) U22.W14@6837.34,3544.19
LX75NC8: U22.Y14 | length 27.8
  Top Layer w15: v1(6778.28,3524.5) U22.Y14@6797.97,3544.19
LX75NC9: U22.T12
LX75NC10: U22.U12 | length 28.3
  Top Layer w15: v1(6897,3604) 6904.85,3611.85 ; 6905.85,3612.85 6904.85,3611.85 ; U22.U12@6916.08,3622.93 6905,3611.85 6904.85,3611.85
LX75NC11: U22.T14
LX75NC12: U22.R13
LX75NC13: U22.R11
LX75NC14: U22.T11
LX75NC15: U22.W10 | length 27.8
  Top Layer w15: v1(6817.65,3721.36) U22.W10@6837.34,3701.67
LX75NC16: U22.Y10 | length 27.8
  Top Layer w15: v1(6778.28,3721.36) U22.Y10@6797.97,3701.67
LX75NC17: U22.W8 | length 27.6
  Top Layer w15: v1@6818,3800 v1(6818,3799.75) U22.W8@6837.34,3780.41
LX75NC18: U22.V7 | length 27.8
  Top Layer w15: v1(6857.02,3839.47) U22.V7@6876.71,3819.78
LX75NC19: U22.W9 | length 24.5
  Top Layer w15: v1(6820,3758.38) U22.W9@6837.34,3741.04
LX75NC20: U22.Y8 | length 24.9
  Top Layer w15: v1(6780.38,3798) U22.Y8@6797.97,3780.41
LX75NC21: U22.U9
LX75NC22: U22.V9
LX75NC23: U22.T8
LX75NC24: U22.U8
LX75NC25: U22.T10
LX75NC26: U22.U10
LX75NC27: U22.W6
LX75NC28: U22.Y6
LX75NC29: U22.Y5
LX75NC30: U22.AB5 | length 27.8
  Top Layer w15: v1(6699.54,3918.21) U22.AB5@6719.23,3898.52
LX75NC31: U22.R9
LX75NC32: U22.R8
LX75NC33: U22.T7
LX75NC34: U22.R7
LX75NC35: U22.U6
LX75NC36: U22.V5 | length 27.8
  Top Layer w15: v1(6857.02,3918.21) U22.V5@6876.71,3898.52
LX75NC37: U22.T16 | length 27.8
  Top Layer w15: v1(6935.76,3445.76) U22.T16@6955.45,3465.45
LX75NC38: U22.T15
LX75NC39: U22.U17 | length 27.8
  Top Layer w15: v1(6896.39,3406.39) U22.U17@6916.08,3426.08
LX75NC40: U22.U16 | length 27.8
  Top Layer w15: v1(6896.39,3445.76) U22.U16@6916.08,3465.45
LX75NC41: U22.V19 | length 27.8
  Top Layer w15: v1(6857.02,3327.65) U22.V19@6876.71,3347.34
LX75NC42: U22.V18
LX75NC43: U22.R16
LX75NC44: U22.R15
LX75NC45: U22.V17 | length 27.8
  Top Layer w15: v1(6857.02,3406.39) U22.V17@6876.71,3426.08
LX75NC46: U22.W17 | length 27.8
  Top Layer w15: v1(6817.65,3406.39) U22.W17@6837.34,3426.08
MCLKIN: R24.2 U22.A11 | length 434.8
  Top Layer w15: U22.A11@7546,3662.3 v1(7565.69,3681.99)
  Top Layer w31.5: v3(7748,3687) 7761,3700 R24.2@7761,3782 ; v3@7748.53,3686.47 ccw(c7718.42,3716.58) 7761,3716.58 cw(c7718.42,3716.58) v3@7748.53,3686.47
  Mid-Layer 1 w15: v1(7565.69,3681.99) 7742.99,3681.99 v3(7748,3687) ; 7717.79,3681.99 ccw(c7717.79,3717.21) 7742.7,3692.3 cw(c7717.79,3717.21) 7717.79,3681.99
NC1: U22.E8 | length 27.8
  Top Layer w15: U22.E8@7388.52,3780.41 v1(7408.21,3800.1)
NC2: U22.F8 | length 27.8
  Top Layer w15: U22.F8@7349.15,3780.41 v1(7368.84,3800.1)
NC3: U22.G8
NC4: U22.F9 | length 27.8
  Top Layer w15: U22.F9@7349.15,3741.04 v1(7368.84,3760.73)
NC5: U22.G9
NC6: U22.H10
NC7: U22.E10
NC8: U22.F10 | length 27.8
  Top Layer w15: U22.F10@7349.15,3701.67 v1(7368.84,3721.36)
NC9: U22.G11 | length 27.8
  Top Layer w15: U22.G11@7309.78,3662.3 v1(7329.47,3681.99)
NC10: U22.H11
NC11: U22.E12 | length 27.8
  Top Layer w15: U22.E12@7388.52,3622.93 v1(7408.21,3603.24)
NC12: U22.D12 | length 27.8
  Top Layer w15: U22.D12@7427.89,3622.93 v1(7447.58,3603.24)
NC13: U22.H12
NC14: U22.F12 | length 27.8
  Top Layer w15: U22.F12@7349.15,3622.93 v1(7368.84,3603.24)
NC15: U22.F13
NC16: U22.D13 | length 27.8
  Top Layer w15: U22.D13@7427.89,3583.56 v1(7447.58,3563.87)
NC17: U22.H13
NC18: U22.G13
NC19: U22.E14
NC20: U22.F15 | length 27.8
  Top Layer w15: U22.F15@7349.15,3504.82 v1(7368.84,3485.13)
NC21: U22.F14
NC22: U22.H14
NC23: U22.P16
NC24: U22.P15
NC25: U22.R17 | length 27.8
  Top Layer w15: v1(6975.13,3406.39) U22.R17@6994.82,3426.08
NC26: U22.K21
NetC1_1: C1.1 R8.2 | length 96.5
  Top Layer w59.06: C1.1@4026,4142 R8.2@4122.53,4142
NetC2_1: C2.1 R9.2 | length 96.8
  Top Layer w59.06: C2.1@4026.12,3988 4122.61,3988 R9.2@4122.8,3988.19
NetC5_1: C5.1 R5.1 U2.3 | length 270.2
  Top Layer w23.62: C5.1@4182,2123 4182,2228 4234.79,2280.79 U2.3@4309.78,2280.79 ; R5.1@4182,2236.19 ccw(c4182,2255.96) R5.1@4195.98,2241.98
NetC6_1: C6.1 R1.1 | length 90
  Top Layer w47.24: R1.1@4066,3686 4066.12,3686.12 C6.1@4156,3686.12
NetC7_1: C7.1 R18.2 | length 90.4
  Top Layer w47.24: C7.1@4252,3686.12 4342.28,3686.12 R18.2@4342.39,3686
NetC8_1: C8.1 C12.2 U1.1 U2.2 | length 818.8
  Top Layer w23.62: U1.1@3997,2644 3997,2566 4018,2545 4303,2545 4338,2510 C8.1@4338,2467 C12.2@4431,2467 4431,2360 4401,2330 U2.2@4309.78,2330
NetC9_1: C9.1 L6.2 U2.4 | length 520
  Top Layer w31.5: U2.4@4309.78,2231.57 4425.43,2231.57 4461.63,2195.37 L6.2@4461.63,2134 C9.1@4349,2134 ; 4433.12,2134 ccw(c4433.12,2162.51) 4453.28,2142.35 cw(c4433.12,2162.51) 4433.12,2134 ; 4433.12,2134 cw(c4433.12,2105.49) 4453.28,2125.65 ccw(c4433.12,2105.49) 4433.12,2134 ; 4461.63,2164.48 ccw(c4490.14,2164.48) 4469.98,2144.32 cw(c4490.14,2164.48) 4461.63,2164.48 ; 4461.63,2164.48 cw(c4433.12,2164.48) 4453.28,2144.32 ccw(c4433.12,2164.48) 4461.63,2164.48
NetC10_1: C10.1 C11.1 L5.2 R21.2 R22.2 | length 635.2
  Top Layer w31.5: C11.1@4484,2615 R22.2@4589,2615 L5.2@4589,2720 R21.2@4589,2828 C10.1@4488,2828 ; 4589,2685.59 ccw(c4554.59,2685.59) 4578.92,2709.92 cw(c4554.59,2685.59) 4589,2685.59 ; 4589,2685.59 cw(c4623.41,2685.59) 4599.08,2709.92 ccw(c4623.41,2685.59) 4589,2685.59 ; 4589,2754.41 ccw(c4623.41,2754.41) 4599.08,2730.08 cw(c4623.41,2754.41) 4589,2754.41 ; 4589,2754.41 cw(c4554.59,2754.41) 4578.92,2730.08 ccw(c4554.59,2754.41) 4589,2754.41
NetC12_1: C12.1 L5.1 R12.1 R15.1 U2.6 | length 1190.8
  Top Layer w23.62: 4472.09,2295.91 ccw(c4508.6,2332.42) 4508.6,2280.79 cw(c4505.23,2323.84) 4474.69,2293.31 ; C12.1@4486,2467 4486,2428 4464,2406 4464,2304 4487.21,2280.79 U2.6@4546,2280.79
  Top Layer w31.5: 4331,2743 4331,2739 ; R12.1@4331,2787 4331,2739 ; L5.1@4459,2720 4438,2699 4371,2699 ; C12.1@4486,2467 4486,2513 4449,2550 4373,2550 4331,2592 4331,2659 ; 4331,2659 R15.1@4331,2699 ; 4331,2659 4371,2699 ; R15.1@4331,2699 4331,2739 ; R15.1@4331,2699 4371,2699 ; 4331,2739 4371,2699 ; 4373.89,2699 ccw(c4373.89,2805.11) 4448.92,2730.08 cw(c4373.89,2805.11) 4373.89,2699
NetC13_2: C13.2 D4.1 J1.1 pad.0@4123,5461 Q1.2 U3.8 | length 2688.5
  Top Layer w59.06: J1.1@4102.36,5338.58 J1.1@4120.36,5356.58 ; J1.1@4113.72,5354.66 ccw(c4140.78,5392.96) J1.1@4164.23,5352.35 ; J1.1@4120.36,5344.58 J1.1@4120.36,5356.58 ; pad.0@4120.36,5458.36 J1.1@4120.36,5356.58 ; J1.1@4134.28,5330.66 cw(c4210.43,5254.52) 4210.43,5362.2 ; 4278.06,5175.87 cw(c4282.65,5143.63) 4305.68,5166.66 ; Q1.2@4291.96,5134.11 ccw(c4342.47,5184.62) 4342.47,5113.19 ; 4362,5113.19 4359.15,5113.19 ; 4368.49,5113.19 ccw(c4368.49,5308.4) D4.1@4506.52,5170.36 ; C13.2@4472.72,5501.13 4442.46,5501.13 4291.34,5350 ; D4.1@4504.33,5165.32 cw(c4450.43,5167.12) 4450.43,5113.19 ; D4.1@4511.81,5175.57 4508,5171.76 D4.1@4508,5170.76 ; 4535.32,4807.68 ccw(c4571.4,4843.76) U3.8@4597.64,4800 4543,4800 4508,4835 4508,5055.62 ; J1.1@4120.36,5356.58 4125.98,5362.2 4246.13,5362.2 ; 4246.13,5362.2 4274.84,5333.5 ; 4246.13,5362.2 4291.34,5362.2 4291.34,5350 ; 4274.84,5333.5 4291.34,5317 ; 4274.84,5333.5 4291.34,5350 ; Q1.2@4278.04,5134.11 ccw(c4245.94,5166.21) 4291.34,5166.21 ; Q1.2@4278.04,5134.11 ccw(c4245.94,5166.21) 4291.34,5166.21 ; Q1.2@4278.04,5134.11 ccw(c4245.94,5166.21) 4291.34,5166.21 ; 4291.34,5181 4291.34,5113.19 4359.15,5113.19 ; 4291.34,5181 4359.15,5113.19 ; 4291.34,5181 4291.34,5317 ; 4291.34,5317 4291.34,5350 ; 4359.15,5113.19 4450.43,5113.19 ; 4450.43,5113.19 D4.1@4508,5170.76 ; 4450.43,5113.19 4508,5055.62 ; 4508,5055.62 D4.1@4508,5170.76 ; J1.1@4116.28,5324.66 cw(c4206.91,5234.03) 4206.91,5362.2 ccw(c4206.91,5234.03) J1.1@4116.28,5324.66 ; 4431.15,5489.82 cw(c4472.72,5448.25) 4472.72,5507.03 ccw(c4472.72,5448.25) 4431.15,5489.82
NetC15_1: C15.1 L7.2 U2.7 U2.8 | length 485.2
  Top Layer w23.62: U2.7@4546,2330 U2.8@4546,2379.21
  Top Layer w31.5: U2.7@4546,2330 4546.37,2329.63 L7.2@4705,2329.63 C15.1@4705,2232 ; 4674.52,2329.63 ccw(c4674.52,2358.14) 4694.68,2337.98 cw(c4674.52,2358.14) 4674.52,2329.63 ; 4674.52,2329.63 cw(c4674.52,2301.12) 4694.68,2321.28 ccw(c4674.52,2301.12) 4674.52,2329.63 ; 4705,2301.12 ccw(c4676.49,2301.12) 4696.65,2321.28 cw(c4676.49,2301.12) 4705,2301.12 ; 4705,2301.12 cw(c4733.51,2301.12) 4713.35,2321.28 ccw(c4733.51,2301.12) 4705,2301.12
NetC16_1: C16.1 R27.2 U7.3 | length 226.2
  Top Layer w23.62: R27.2@4858.79,2376.21 4858.79,2280.79 U7.3@4989.54,2280.79
NetC18_2: C18.2 R23.2 U5.16 | length 339.5
  Top Layer w23.62: U5.16@4731.51,3093 4778,3093 4789,3082 R23.2@4789,2992 C18.2@4895,2992 ; 4785.5,3085.5 ccw(c4766.76,3066.77) U5.16@4763.01,3093 ; U5.16@4763.01,3093 cw(c4763.01,3056.81) 4788.6,3082.4 ccw(c4763.01,3056.81) U5.16@4763.01,3093
NetC19_2: C19.2 L11.2 U13.2 | length 503
  Top Layer w31.5: C19.2@5101,5092 L11.2@5101,4980 5102.09,4978.91 U13.2@5275.4,4978.91 ; 5101,5014.41 ccw(c5135.41,5014.41) L11.2@5111.08,4990.08 ; 5101,5014.41 cw(c5066.59,5014.41) 5090.92,4990.08 ccw(c5066.59,5014.41) 5101,5014.41 ; 5101,5014.41 ccw(c5135.41,5014.41) L11.2@5111.08,4990.08 ; L11.2@5111.08,4990.08 ccw(c5138.05,5017.05) 5138.05,4978.91 cw(c5138.05,5017.05) L11.2@5111.08,4990.08 ; L11.2@5111.08,4969.92 cw(c5132.76,4948.24) 5132.76,4978.91 ccw(c5132.76,4948.24) L11.2@5111.08,4969.92
NetC20_1: C20.1 L10.1 U8.1 U8.20 | length 634
  Top Layer w23.62: L10.1@5011,4008.63 C20.1@5011,3870 U8.20@5127.08,3870 U8.1@5386.92,3870 ; 5011,3970.61 ccw(c4972.98,3970.61) 4999.86,3997.49 cw(c4972.98,3970.61) 5011,3970.61 ; 5011,3970.61 cw(c5049.02,3970.61) 5022.14,3997.49 ccw(c5049.02,3970.61) 5011,3970.61
NetC21_1: C21.1 C24.2 U6.1 U7.2 | length 698.5
  Top Layer w23.62: U6.1@4753,2644 4753,2566 4781,2538 4974,2538 5002,2510 C21.1@5002,2467 C24.2@5089,2467 5089,2361 5058,2330 U7.2@4989.54,2330
NetC22_1: C22.1 L13.1 U9.20 | length 481.9
  Top Layer w19.68: U9.20@5186.8,4513.84 5229.16,4513.84 5258,4485 C22.1@5258,4425 L13.1@5338.63,4425 ; 5258,4444.69 ccw(c5277.69,4444.69) 5263.77,4430.77 cw(c5277.69,4444.69) 5258,4444.69 ; 5258,4444.69 cw(c5238.31,4444.69) 5252.23,4430.77 ccw(c5238.31,4444.69) 5258,4444.69 ; 5278.69,4425 ccw(c5278.69,4405.31) 5264.77,4419.23 cw(c5278.69,4405.31) 5278.69,4425 ; 5278.69,4425 cw(c5278.69,4444.69) 5264.77,4430.77 ccw(c5278.69,4444.69) 5278.69,4425 ; 5295.86,4425 ccw(c5295.86,4467.77) 5326.1,4437.53 cw(c5295.86,4467.77) 5295.86,4425 ; 5295.86,4425 cw(c5295.86,4382.23) 5326.1,4412.47 ccw(c5295.86,4382.23) 5295.86,4425
NetC23_1: C23.1 R28.2 U5.2 U5.5 U5.7 U5.13 U11.2 U11.3 U11.13 | length 1457.7
  Top Layer w23.62: U5.13@4731.51,3243 4798,3243 ; 4827,3326 4827,3322 ; U5.2@4920.49,3143 4853,3143 4827,3169 4827,3214 ; U5.5@4920.49,3293 4856,3293 ; U5.7@4920.49,3393 4852,3393 4827,3368 4827,3322 ; C23.1@5046,3270 5101,3270 5128,3243 U11.13@5174.51,3243 5247,3243 5297,3193 U11.3@5363.49,3193 U11.2@5363.49,3143 ; 4798,3243 4827,3214 ; 4798,3243 4827,3243 ; 4798,3243 4827,3272 ; 4827,3214 4827,3243 ; 4827,3243 4827,3272 ; 4827,3272 4827,3293 ; 4827,3272 4848,3293 ; 4827,3293 4848,3293 ; 4827,3293 4827,3322 ; 4827,3322 4856,3293 ; 4848,3293 4856,3293 ; 5117.38,3253.62 ccw(c5143.02,3279.25) 5143.02,3243 cw(c5143.02,3279.25) 5117.38,3253.62
  Top Layer w31.5: U5.7@4920.49,3393 R28.2@5046,3393 C23.1@5046,3270
NetC24_1: C24.1 L12.1 R29.1 R30.1 U7.6 | length 981.4
  Top Layer w23.62: C24.1@5144,2467 5144,2308 5171.21,2280.79 U7.6@5225.76,2280.79 ; 5159.09,2292.91 ccw(c5188.35,2322.17) 5188.35,2280.79 cw(c5188.35,2322.17) 5159.09,2292.91
  Top Layer w31.5: R29.1@5057,2787 R30.1@5057,2699 ; C24.1@5144,2467 5144,2522 5057,2609 R30.1@5057,2699 ; L12.1@5190,2720 5169,2699 R30.1@5057,2699 ; 5104.89,2699 ccw(c5104.89,2805.11) 5179.92,2730.08 cw(c5104.89,2805.11) 5104.89,2699
NetC25_1: C25.1 L9.2 U7.4 | length 390.8
  Top Layer w31.5: U7.4@4989.54,2231.57 5076.43,2231.57 5113,2195 C25.1@5113,2134 L9.2@5011.37,2134 ; 5039.88,2134 ccw(c5039.88,2105.49) 5019.72,2125.65 cw(c5039.88,2105.49) 5039.88,2134 ; 5039.88,2134 cw(c5039.88,2162.51) 5019.72,2142.35 ccw(c5039.88,2162.51) 5039.88,2134
NetC26_1: C26.1 C27.1 L12.2 R35.2 R36.2 R39.2 | length 898.3
  Top Layer w31.5: C27.1@5218,2615 R36.2@5320,2615 L12.2@5320,2720 ; C26.1@5218,2828 R35.2@5320,2828 L12.2@5320,2720 ; R39.2@5477,2720 L12.2@5320,2720 ; 5320,2685.59 ccw(c5285.59,2685.59) 5309.92,2709.92 cw(c5285.59,2685.59) 5320,2685.59 ; 5320,2685.59 cw(c5354.41,2685.59) L12.2@5330.08,2709.92 ; 5320,2685.59 cw(c5354.41,2685.59) L12.2@5330.08,2709.92 ; 5320,2754.41 ccw(c5354.41,2754.41) L12.2@5330.08,2730.08 ; 5320,2754.41 cw(c5285.59,2754.41) 5309.92,2730.08 ccw(c5285.59,2754.41) 5320,2754.41 ; 5320,2754.41 ccw(c5354.41,2754.41) L12.2@5330.08,2730.08 ; L12.2@5330.08,2709.92 cw(c5354.41,2685.59) 5354.41,2720 ; L12.2@5330.08,2709.92 cw(c5354.41,2685.59) 5354.41,2720 ; L12.2@5330.08,2730.08 ccw(c5354.41,2754.41) 5354.41,2720 ; L12.2@5330.08,2730.08 ccw(c5354.41,2754.41) 5354.41,2720
NetC28_2: C28.2 R33.2 U11.16 | length 364.8
  Top Layer w23.62: U11.16@5174.51,3093 5220,3093 5236.5,3076.5 5236.5,2994.5 R33.2@5239,2992 C28.2@5342,2992 ; 5227,3086 ccw(c5209.51,3068.52) U11.16@5206.01,3093 ; U11.16@5206.01,3093 cw(c5206.01,3059.22) 5229.89,3083.11 ccw(c5206.01,3059.22) U11.16@5206.01,3093 ; 5236.5,3010.55 ccw(c5256.55,3010.55) 5242.38,2996.38 cw(c5256.55,3010.55) 5236.5,3010.55
NetC30_1: C30.1 C38.2 U15.1 U16.2 | length 551.1
  Top Layer w23.62: U15.1@5619,2644 C30.1@5619,2516 5665,2470 5738,2470 ; U16.2@5669.29,2330 5738,2330 5765,2357 5765,2443 ; 5738,2470 C38.2@5765,2470 5765,2443 ; 5738,2470 5765,2443
NetC31_1: C31.1 L14.2 U7.7 U7.8 | length 444.2
  Top Layer w31.5: U7.8@5225.76,2379.21 U7.7@5225.76,2330 5226.13,2329.63 L14.2@5383,2329.63 5382,2328.63 C31.1@5382,2232 ; 5352.52,2329.63 ccw(c5352.52,2358.14) 5372.68,2337.98 cw(c5352.52,2358.14) 5352.52,2329.63 ; 5352.52,2329.63 cw(c5352.52,2301.12) L14.2@5372.68,2321.28 ; 5352.52,2329.63 cw(c5352.52,2301.12) L14.2@5372.68,2321.28 ; L14.2@5372.68,2321.28 cw(c5350.18,2298.78) 5382,2298.78 ccw(c5350.18,2298.78) L14.2@5372.68,2321.28
NetC33_1: C33.1 R40.2 U16.3 | length 223.2
  Top Layer w23.62: R40.2@5543.19,2376.82 C33.1@5543.19,2280 5543.98,2280.79 U16.3@5669.29,2280.79
NetC34_2: C34.2 L17.2 U12.7 | length 672.3
  Top Layer w20: 5438.48,5330.52 ccw(c5474.22,5366.26) U12.7@5474.22,5315.72 ; U12.7@5511.62,5313.91 5455.09,5313.91 5422,5347 5422,5415 5439,5432 5561,5432 5582,5453 C34.2@5582,5491 L17.2@5693,5491 ; C34.2@5576.34,5485.34 cw(c5562.69,5471.69) 5582,5471.69 cw(c5601.31,5471.69) C34.2@5587.66,5485.34 ; C34.2@5588.66,5485.34 cw(c5602.31,5471.69) 5602.31,5491 cw(c5602.31,5510.31) C34.2@5588.66,5496.66 ; L17.2@5678.86,5476.86 ccw(c5644.72,5442.72) 5644.72,5491 ccw(c5644.72,5539.28) L17.2@5678.86,5505.14
NetC35_1: C35.1 R38.2 U11.7 | length 268.5
  Top Layer w31.5: U11.7@5363.49,3393 R38.2@5475,3393 C35.1@5632,3393
NetC36_1: C36.1 L18.1 U17.3 | length 582.2
  Top Layer w20: C36.1@5697,5265 C36.1@5697.31,5264.69 U17.3@5811.4,5264.69 5889.31,5264.69 5920,5234 L18.1@5920,5100 ; 5716.62,5264.69 ccw(c5716.62,5245.38) 5702.96,5259.04 cw(c5716.62,5245.38) 5716.62,5264.69 ; 5716.62,5264.69 cw(c5716.62,5284.01) 5702.96,5270.35 ccw(c5716.62,5284.01) 5716.62,5264.69 ; 5920,5148.28 ccw(c5968.28,5148.28) 5934.14,5114.14 cw(c5968.28,5148.28) 5920,5148.28 ; 5920,5148.28 cw(c5871.72,5148.28) 5905.86,5114.14 ccw(c5871.72,5148.28) 5920,5148.28
NetC38_1: C38.1 R45.1 R46.1 R53.2 U16.6 | length 736.1
  Top Layer w23.62: U16.6@5905.51,2280.79 5843.21,2280.79 5820,2304 C38.1@5820,2470 5820,2543 5914,2637 R46.1@5914,2699 ; R45.1@5914,2787 R46.1@5914,2699 ; R53.2@6033,2699 R46.1@5914,2699
NetC39_1: C39.1 L15.2 U16.4 | length 446.6
  Top Layer w31.5: U16.4@5669.29,2231.57 5767.43,2231.57 5795,2204 5795,2166 ; L15.2@5695.37,2134 5763,2134 ; 5795,2171 5795,2166 ; 5723.88,2134 ccw(c5723.88,2105.49) 5703.72,2125.65 cw(c5723.88,2105.49) 5723.88,2134 ; 5723.88,2134 cw(c5723.88,2162.51) 5703.72,2142.35 ccw(c5723.88,2162.51) 5723.88,2134 ; 5763,2134 C39.1@5795,2134 5795,2166 ; 5763,2134 5795,2166
NetC41_2: C41.2 D18.3 SW2.2 | length 1239.5
  Top Layer w7: C41.2@5528,4256 5593,4256 5597,4260 ; C41.2@5533.3,4250.7 cw(c5546.11,4237.89) 5546.11,4256 cw(c5546.11,4274.11) C41.2@5533.3,4261.3 ; C41.2@5538.25,4245.75 cw(c5563.01,4220.99) 5563.01,4256 cw(c5563.01,4291.01) C41.2@5538.25,4266.25 ; SW2.2@5584.6,4311.6 cw(c5554.65,4281.65) 5597,4281.65 ; SW2.2@5589.55,4316.55 cw(c5571.55,4298.55) 5597,4298.55 ; 5597,4259.75 cw(c5664.04,4259.75) SW2.2@5620.07,4310.35 ; 5597,4275.1 cw(c5650.7,4275.1) SW2.2@5615.48,4315.64 ; 5597,4290.46 cw(c5637.36,4290.46) SW2.2@5610.89,4320.92 ; SW2.2@5603,4330 5597,4324 5597,4260 ; D18.3@6211.9,4151.15 6248,4187.25 6248,4232 6233,4247 5610,4247 5597,4260 ; D18.3@6216.05,4151.15 cw(c6226.08,4151.15) D18.3@6218.99,4158.24 ; D18.3@6223.05,4151.15 cw(c6249.98,4151.15) 6230.94,4170.19 ; D18.3@6230.05,4151.15 cw(c6273.88,4151.15) 6242.89,4182.14
NetC42_1: C42.1 L19.2 U16.7 U16.8 | length 439.6
  Top Layer w31.5: U16.8@5906.14,2378.58 5906.14,2330.63 L19.2@6020,2330.63 C42.1@6020,2232 ; 5989.52,2330.63 ccw(c5989.52,2359.14) 6009.68,2338.98 cw(c5989.52,2359.14) 5989.52,2330.63 ; 5989.52,2330.63 cw(c5989.52,2302.12) 6009.68,2322.28 ccw(c5989.52,2302.12) 5989.52,2330.63 ; 6020,2302.12 ccw(c5991.49,2302.12) 6011.65,2322.28 cw(c5991.49,2302.12) 6020,2302.12 ; 6020,2302.12 cw(c6048.51,2302.12) 6028.35,2322.28 ccw(c6048.51,2302.12) 6020,2302.12
NetC45_1: C45.1 R63.1 R74.2 U20.4 | length 664.6
  Top Layer w23.62: U20.4@6289,2327.79 6346.79,2327.79 6374,2355 R63.1@6374,2644 C45.1@6374,2739 R74.2@6481,2739 ; U20.4@6326.4,2327.79 ccw(c6326.4,2377) 6361.2,2342.2 cw(c6326.4,2377) U20.4@6326.4,2327.79
NetC45_2: C45.2 R58.1 R63.2 U20.1 | length 499.7
  Top Layer w23.62: R58.1@6201,2644 R63.2@6319,2644 ; U20.1@6258.14,2475.86 6289,2506.71 ; U20.1@6289,2475.43 6289,2506.71 ; 6306.76,2488.95 cw(c6292.71,2474.9) U20.1@6312.38,2472.08 ; C45.2@6319,2739 R63.2@6319,2644 ; U20.1@6319.86,2475.86 6289,2506.71 ; 6289,2506.71 6289,2538 6319,2568 R63.2@6319,2644
NetC47_1: C47.1 R64.1 R72.2 U20.8 | length 609.4
  Top Layer w23.62: R64.1@6313.33,2168 6358,2168 ; C47.1@6504,2168 R72.2@6408.67,2168 6358,2168 ; U20.8@6525.22,2475.43 6453.43,2475.43 6427,2449 6427,2356 6358,2287 6358,2168
NetC47_2: C47.2 R72.1 R75.2 U20.5 | length 589
  Top Layer w23.62: 6454.77,2316.77 cw(c6482.31,2289.23) U20.5@6487.82,2327.79 ; U20.5@6525.22,2327.79 6465.79,2327.79 6408.67,2270.67 R72.1@6408.67,2223 C47.2@6504,2223 6571,2223 6605,2189 R75.2@6605,2118 ; U20.5@6487.82,2327.79 ccw(c6487.82,2274.6) 6450.21,2312.21 cw(c6487.82,2274.6) U20.5@6487.82,2327.79
NetC49_1: C49.1 R79.2 U21.6 | length 837.4
  Top Layer w12: U21.6@6694,4617.43 6739.43,4617.43 6754,4632 v7(6754,4650) ; C49.1@6847,4573 v7(6847,4650) R79.2@6847,4710 ; v7@6749.76,4645.76 cw(c6739.51,4635.51) 6754,4635.51 ; v7@6749.76,4645.76 cw(c6739.51,4635.51) 6754,4635.51 ; v7@6749.76,4645.76 cw(c6739.51,4635.51) 6754,4635.51 ; 6754,4635.51 cw(c6768.49,4635.51) v7@6758.24,4645.76 ; 6754,4635.51 cw(c6768.49,4635.51) v7@6758.24,4645.76 ; 6754,4635.51 cw(c6768.49,4635.51) v7@6758.24,4645.76 ; v7@6842.76,4645.76 cw(c6832.51,4635.51) 6847,4635.51 ; v7@6842.76,4645.76 cw(c6832.51,4635.51) 6847,4635.51 ; v7@6842.76,4645.76 cw(c6832.51,4635.51) 6847,4635.51 ; v7@6842.76,4654.24 ccw(c6832.51,4664.49) 6847,4664.49 ; v7@6842.76,4654.24 ccw(c6832.51,4664.49) 6847,4664.49 ; v7@6842.76,4654.24 ccw(c6832.51,4664.49) 6847,4664.49 ; 6847,4601.97 ccw(c6875.97,4601.97) 6855.49,4581.49 cw(c6875.97,4601.97) 6847,4601.97 ; 6847,4601.97 cw(c6818.03,4601.97) 6838.51,4581.49 ccw(c6818.03,4601.97) 6847,4601.97 ; 6847,4635.51 cw(c6861.49,4635.51) v7@6851.24,4645.76 ; 6847,4635.51 cw(c6861.49,4635.51) v7@6851.24,4645.76 ; 6847,4635.51 cw(c6861.49,4635.51) v7@6851.24,4645.76 ; 6847,4664.49 ccw(c6861.49,4664.49) v7@6851.24,4654.24 ; 6847,4664.49 ccw(c6861.49,4664.49) v7@6851.24,4654.24 ; 6847,4664.49 ccw(c6861.49,4664.49) v7@6851.24,4654.24 ; 6847,4681.03 ccw(c6818.03,4681.03) 6838.51,4701.51 cw(c6818.03,4681.03) 6847,4681.03 ; 6847,4681.03 cw(c6875.97,4681.03) 6855.49,4701.51 ccw(c6875.97,4681.03) 6847,4681.03
  Bottom Layer w12: v7(6754,4650) v7(6847,4650) ; v7@6758.24,4645.76 cw(c6768.49,4635.51) 6768.49,4650 ; v7@6758.24,4645.76 cw(c6768.49,4635.51) 6768.49,4650 ; v7@6758.24,4645.76 cw(c6768.49,4635.51) 6768.49,4650 ; v7@6758.24,4654.24 ccw(c6768.49,4664.49) 6768.49,4650 ; v7@6758.24,4654.24 ccw(c6768.49,4664.49) 6768.49,4650 ; v7@6758.24,4654.24 ccw(c6768.49,4664.49) 6768.49,4650 ; 6832.51,4650 cw(c6832.51,4635.51) v7@6842.76,4645.76 ; 6832.51,4650 ccw(c6832.51,4664.49) v7@6842.76,4654.24 ; 6832.51,4650 cw(c6832.51,4635.51) v7@6842.76,4645.76 ; 6832.51,4650 ccw(c6832.51,4664.49) v7@6842.76,4654.24 ; 6832.51,4650 ccw(c6832.51,4664.49) v7@6842.76,4654.24 ; 6832.51,4650 cw(c6832.51,4635.51) v7@6842.76,4645.76
NetC55_1: C55.1 U23.28 | length 66.5
  Top Layer w12: C55.1@7092.47,2574.85 ccw(c7081.04,2586.28) 7097.21,2586.28 ; C55.1@7095.3,2571.02 7097.21,2572.93 U23.28@7097.21,2624